# Altium PCB ArmBoard.PcbDoc
Units mil, origin at the board's own origin, x right, y up, seen from the top; angles counter-clockwise.
Board outline 6000 x 4000 mil, 2 copper layers (Top Layer, Bottom Layer); 61 components, 76 nets, 304 pads, 0 vias.
Unrouted connection lines stored in the file: 209.
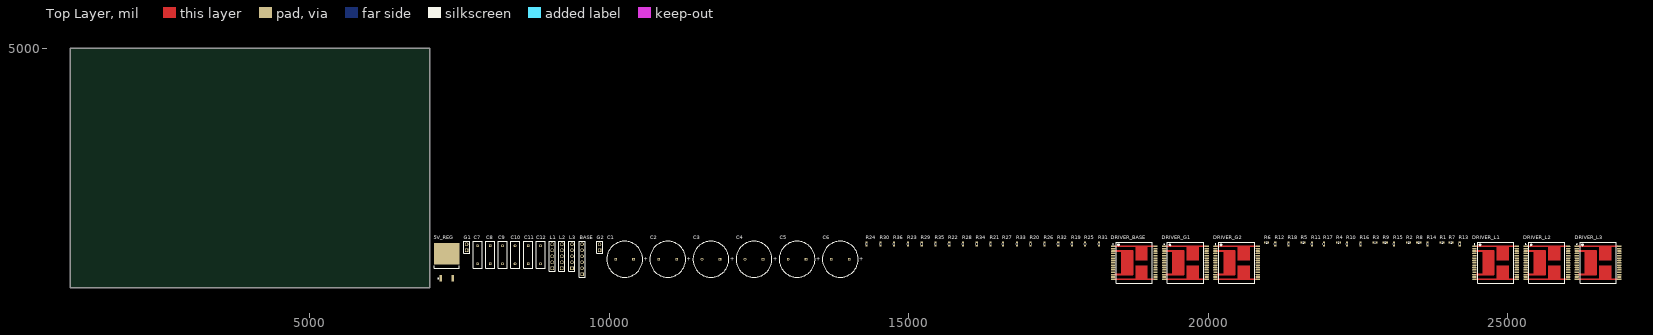
[diagram p0: Top Layer view]
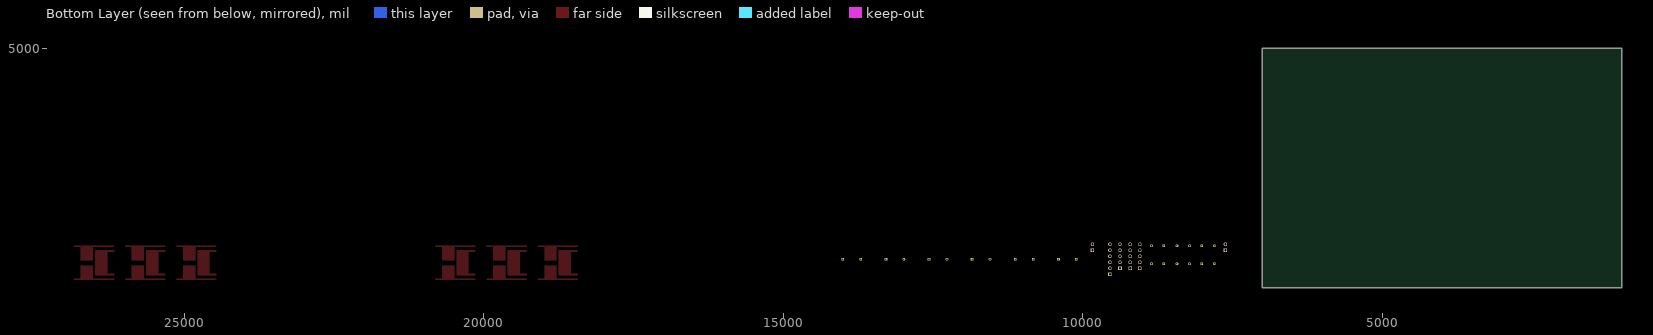
[diagram p1: Bottom Layer view, seen from below]

## Layer stack, top to bottom
Top Solder: solder mask 0.4, Solder Resist, Dk 3.5
Top Layer: signal copper 1.4
Dielectric 1: dielectric 12.6, FR-4, Dk 4.8
Bottom Layer: signal copper 1.4
Bottom Solder: solder mask 0.4, Solder Resist, Dk 3.5

## Board outline
1000,1000 7000,1000 7000,5000 1000,5000

## Design rules (kind name [scope] priority, off if disabled: settings)
Clearance [All] p1: gap=10
PolygonConnect [All] p1: connectstyle=Relief reliefconductorwidth=10 reliefentries=4 polygonreliefangle="90 Angle" airgapwidth=10
RoomDefinition ArmBoard [InComponentClass('ArmBoard')] p1: confinementstyle=ConfineIn formatcopy=TRUE lockcomponents=FALSE outline 7045,1060 26920,1060 26920,1890 7045,1890
RoutingVias [All] p1: holewidth=28 width=50 viastyle="Through Hole" minholewidth=28 minwidth=50 maxholewidth=28 maxwidth=50
SolderMaskExpansion [All] p1: expansion=4
Width [All] p1: maxlimit=10 minlimit=10 preferedwidth=10
30 further rules are at their usual default settings.

## Components (designator, comment, footprint, x,y, rotation, side; value= is the part's Value field where it differs from the comment)
5V_REG "" D2PAK_M 7285,1430 r90 top
BASE "Header 6" HDR1X6 9545,1230 r90 top
C1 "" RB7.6-15 10255,1480 r0 top
C2 "" RB7.6-15 10975,1480 r0 top
C3 "" RB7.6-15 11695,1480 r0 top
C4 "" RB7.6-15 12415,1480 r0 top
C5 "" RB7.6-15 13135,1480 r0 top
C6 "" RB7.6-15 13855,1480 r0 top
C7 "" RAD-0.3 7800,1555 r90 top
C8 "" RAD-0.3 8010,1555 r90 top
C9 "" RAD-0.3 8215,1555 r90 top
C10 "" RAD-0.3 8425,1555 r90 top
C11 "" RAD-0.3 8645,1555 r90 top
C12 "" RAD-0.3 8850,1555 r90 top
DRIVER_BASE "VNH5019 motor driver" VNH5019 18765,1420 r0 top
DRIVER_G1 "VNH5019 motor driver" VNH5019 19620,1420 r0 top
DRIVER_G2 "VNH5019 motor driver" VNH5019 20475,1420 r0 top
DRIVER_L1 "VNH5019 motor driver" VNH5019 24800,1420 r0 top
DRIVER_L2 "VNH5019 motor driver" VNH5019 25655,1420 r0 top
DRIVER_L3 "VNH5019 motor driver" VNH5019 26510,1420 r0 top
G1 "Header 2" HDR1X2 7615,1630 r90 top
G2 "Header 2" HDR1X2 9835,1630 r90 top
L1 "Header 5" HDR1X5 9045,1330 r90 top
L2 "Header 5" HDR1X5 9205,1330 r90 top
L3 "Header 5" HDR1X5 9375,1330 r90 top
R1 "Res3" J1-0603 23905,1760 r0 top
R2 "Res3" J1-0603 23345,1760 r0 top
R3 "Res3" J1-0603 22785,1760 r0 top
R4 "Res3" J1-0603 22175,1760 r0 top
R5 "Res3" J1-0603 21585,1760 r0 top
R6 "Res3" J1-0603 20975,1760 r0 top
R7 "Res3" J1-0603 24055,1760 r0 top
R8 "Res3" J1-0603 23515,1760 r0 top
R9 "Res3" J1-0603 22955,1760 r0 top
R10 "Res3" J1-0603 22320,1735 r90 top
R11 "Res3" J1-0603 21730,1735 r90 top
R12 "Res3" J1-0603 21120,1735 r90 top
R13 "Res3" J1-0603 24200,1735 r90 top
R14 "Res3" J1-0603 23660,1735 r90 top
R15 "Res3" J1-0603 23100,1735 r90 top
R16 "Res3" J1-0603 22540,1735 r90 top
R17 "Res3" J1-0603 21930,1735 r90 top
R18 "Res3" J1-0603 21340,1735 r90 top
R19 "Res3" J1-0603 17725,1735 r90 top
R20 "Res3" J1-0603 17035,1735 r90 top
R21 "Res3" J1-0603 16365,1735 r90 top
R22 "Res3" J1-0603 15675,1735 r90 top
R23 "Res3" J1-0603 14985,1735 r90 top
R24 "Res3" J1-0603 14295,1735 r90 top
R25 "Res3" J1-0603 17945,1735 r90 top
R26 "Res3" J1-0603 17265,1735 r90 top
R27 "Res3" J1-0603 16575,1735 r90 top
R28 "Res3" J1-0603 15905,1735 r90 top
R29 "Res3" J1-0603 15215,1735 r90 top
R30 "Res3" J1-0603 14525,1735 r90 top
R31 "Res3" J1-0603 18175,1735 r90 top
R32 "Res3" J1-0603 17495,1735 r90 top
R33 "Res3" J1-0603 16805,1735 r90 top
R34 "Res3" J1-0603 16135,1735 r90 top
R35 "Res3" J1-0603 15445,1735 r90 top
R36 "Res3" J1-0603 14755,1735 r90 top

## Footprints (in the part's own frame and the unit in brackets; to place one, negate y for a bottom-side part, rotate by r counter-clockwise, add the part's x,y. Pads: shape width x height; smd on the part's side, far side on the other; paste and mask are expansions set on the pad)
D2PAK_M [mm] "D2-PAK, 4-Leads, Body 8.8x10.4mm, Pitch 2.54mm, Lead Span 15.1mm, IPC Low Density"
  rect 2.7x1.1 smd: 1(-6.85,2.54) 3(-6.85,-2.54)
  rect 9.2x10.7 smd: 2(3.6,0)
  silkscreen extent -6.97,-5.25 -1.4,5.25, body extent -2.65,-5.28 6.35,5.28, height 4.69
HDR1X2 [mm] "Connector; Header; 2 Position"
  rect 1.5x1.5 hole 0.9: 1(0,0)
  round 1.5 hole 0.9: 2(2.54,0)
  silkscreen extent -1.27,-1.27 3.81,1.27
HDR1X5 [mm] "Connector; Header; 5 Position"
  rect 1.5x1.5 hole 0.9: 1(0,0)
  round 1.5 hole 0.9: 2(2.54,0) 3(5.08,0) 4(7.62,0) 5(10.16,0)
  silkscreen extent -1.27,-1.27 11.43,1.27
HDR1X6 [mm] "Connector; Header; 6 Position"
  rect 1.5x1.5 hole 0.9: 1(0,0)
  round 1.5 hole 0.9: 2(2.54,0) 3(5.08,0) 4(7.62,0) 5(10.16,0) 6(12.7,0)
  silkscreen extent -1.27,-1.27 13.97,1.27
J1-0603 [mm] "Chip Resistor, Body 1.6x0.8mm, IPC High Density"
  rect 0.7x0.9 smd: 1(-0.75,0) 2(0.75,0)
  silkscreen extent -0.2,-0.35 0.2,0.35, body extent -0.85,-0.48 0.85,0.48, height 0.9
RAD-0.3 [mm] "Radial Cap, Thru-Hole; 2 Leads; 0.3 in Pin Spacing"
  round 1.2 hole 0.7: 1(-3.81,0) 2(3.81,0)
  silkscreen extent -5.71,-1.91 5.71,1.91
RB7.6-15 [mm] "Polarized Capacitor (Radial); 2 Leads"
  rect 1.2x1.2 hole 0.7: 1(3.81,0)
  round 1.2 hole 0.7: 2(-3.81,0)
  silkscreen extent -7.62,-7.62 7.62,7.62
VNH5019 [mm] "MultiPowerSO-30"
  oval 1.9x0.7 smd: 1(-9,7) 2(-9,6) 3(-9,5) 4(-9,4) 5(-9,3) 6(-9,2) 7(-9,1) 8(-9,0) 9(-9,-1) 10(-9,-2) 11(-9,-3) 12(-9,-4) 13(-9,-5) 14(-9,-6) 15(-9,-7) 16(9,-7) 17(9,-6) 18(9,-5) 19(9,-4) 20(9,-3) 21(9,-2) 22(9,-1) 23(9,0) 24(9,1) 25(9,2) 26(9,3) 27(9,4) 28(9,5) 29(9,6) 30(9,7)
  Top Layer region: 0.425,-7.28 5.675,-7.28 5.675,-1.05 0.425,-1.05
  Top Layer region: -5.675,-5.15 -0.425,-5.15 -0.425,5.15 -5.675,5.15
  Top Layer region: 0.425,1.05 5.675,1.05 5.675,7.28 0.425,7.28
  Top Layer lines w0.75: -8.25,-7 8.2,-7 ; -8.25,-5 -0.8,-5 ; -8.25,5 -0.8,5 ; -8.25,7 8.25,7
  silkscreen extent -9.12,-8.65 7.65,8.65, body extent -8.05,-8.65 8.05,8.65, height 2.35

## Part data
5V_REG: library part "Volt Reg", "Voltage Regulator"
BASE: "Header, 6-Pin"
C1 C2 C3 C4 C5 C6: library part "Cap Pol1", "Polarized Capacitor (Radial)"
C7 C8 C9 C10 C11 C12: library part Cap, "Capacitor"
DRIVER_BASE DRIVER_G1 DRIVER_G2 DRIVER_L1 DRIVER_L2 DRIVER_L3: library part VNH5019, "Motor driver"
G1 G2: "Header, 2-Pin"
L1 L2 L3: "Header, 5-Pin"
R1 R2 R3 R4 R5 R6 R7 R8 R9 R10 R11 R12 R13 R14 R15 R16 R17 R18 R19 R20 R21 R22 R23 R24 R25 R26 R27 R28 R29 R30 R31 R32 R33 R34 R35 R36: "Resistor"

## Nets (pads, with @x,y where several pads share a name; then routed paths per layer and width w, separated by ;. In a path a pad name is that pad's centre, name@x,y a point inside that pad or via, vN(x,y) a via of type N, cw(c..) or ccw(c..) an arc to the next point about the centre after c; other vN are vias at no path point)
5V: 5V_REG.3 BASE.3 L1.3 L2.3 L3.3
BASE_DATA_IN: 
BASE_DATA_OUT: 
BASE_INTA: BASE.4
BASE_INTB: BASE.5
BASE_INTERRUPT: 
CP: DRIVER_BASE.11 DRIVER_G1.11 DRIVER_G2.11 DRIVER_L1.11 DRIVER_L2.11 DRIVER_L3.11
GND: 5V_REG.2 BASE.6 C1.2 C2.2 C3.2 C4.2 C5.2 C6.2 C7.2 C8.2 C9.2 C10.2 C11.2 C12.2 DRIVER_BASE.17 DRIVER_BASE.18 DRIVER_BASE.19 DRIVER_BASE.20 DRIVER_BASE.26 DRIVER_BASE.27 DRIVER_BASE.28 DRIVER_BASE.29 DRIVER_G1.17 DRIVER_G1.18 DRIVER_G1.19 DRIVER_G1.20 DRIVER_G1.26 DRIVER_G1.27 DRIVER_G1.28 DRIVER_G1.29 DRIVER_G2.17 DRIVER_G2.18 DRIVER_G2.19 DRIVER_G2.20 DRIVER_G2.26 DRIVER_G2.27 DRIVER_G2.28 DRIVER_G2.29 DRIVER_L1.17 DRIVER_L1.18 DRIVER_L1.19 DRIVER_L1.20 DRIVER_L1.26 DRIVER_L1.27 DRIVER_L1.28 DRIVER_L1.29 DRIVER_L2.17 DRIVER_L2.18 DRIVER_L2.19 DRIVER_L2.20 DRIVER_L2.26 DRIVER_L2.27 DRIVER_L2.28 DRIVER_L2.29 DRIVER_L3.17 DRIVER_L3.18 DRIVER_L3.19 DRIVER_L3.20 DRIVER_L3.26 DRIVER_L3.27 DRIVER_L3.28 DRIVER_L3.29 L1.5 L2.5 L3.5 R5.1 R6.1 R11.1 R12.1 R17.1 R18.1 R23.1 R24.1 R29.1 R30.1 R35.1 R36.1
INA_BASE: R20.1
INA_G1: R26.1
INA_G2: R32.1
INA_L1: R2.1
INA_L2: R8.1
INA_L3: R14.1
INB_BASE: R21.1
INB_G1: R27.1
INB_G2: R33.1
INB_L1: R3.1
INB_L2: R9.1
INB_L3: R15.1
NetDRIVER_BASE_4: DRIVER_BASE.4 R20.2
NetDRIVER_BASE_5: DRIVER_BASE.5 DRIVER_BASE.9 R19.1
NetDRIVER_BASE_7: DRIVER_BASE.7 R22.2
NetDRIVER_BASE_8: DRIVER_BASE.8 R24.2
NetDRIVER_BASE_10: DRIVER_BASE.10 R21.2
NetDRIVER_G1_4: DRIVER_G1.4 R26.2
NetDRIVER_G1_5: DRIVER_G1.5 DRIVER_G1.9 R25.1
NetDRIVER_G1_7: DRIVER_G1.7 R28.2
NetDRIVER_G1_8: DRIVER_G1.8 R30.2
NetDRIVER_G1_10: DRIVER_G1.10 R27.2
NetDRIVER_G2_4: DRIVER_G2.4 R32.2
NetDRIVER_G2_5: DRIVER_G2.5 DRIVER_G2.9 R31.1
NetDRIVER_G2_7: DRIVER_G2.7 R34.2
NetDRIVER_G2_8: DRIVER_G2.8 R36.2
NetDRIVER_G2_10: DRIVER_G2.10 R33.2
NetDRIVER_L1_4: DRIVER_L1.4 R2.2
NetDRIVER_L1_5: DRIVER_L1.5 DRIVER_L1.9 R1.1
NetDRIVER_L1_7: DRIVER_L1.7 R4.2
NetDRIVER_L1_8: DRIVER_L1.8 R6.2
NetDRIVER_L1_10: DRIVER_L1.10 R3.2
NetDRIVER_L2_4: DRIVER_L2.4 R8.2
NetDRIVER_L2_5: DRIVER_L2.5 DRIVER_L2.9 R7.1
NetDRIVER_L2_7: DRIVER_L2.7 R10.2
NetDRIVER_L2_8: DRIVER_L2.8 R12.2
NetDRIVER_L2_10: DRIVER_L2.10 R9.2
NetDRIVER_L3_4: DRIVER_L3.4 R14.2
NetDRIVER_L3_5: DRIVER_L3.5 DRIVER_L3.9 R13.1
NetDRIVER_L3_7: DRIVER_L3.7 R16.2
NetDRIVER_L3_8: DRIVER_L3.8 R18.2
NetDRIVER_L3_10: DRIVER_L3.10 R15.2
OUTA_BASE: BASE.1 DRIVER_BASE.1 DRIVER_BASE.24 DRIVER_BASE.25 DRIVER_BASE.30
OUTA_G1: DRIVER_G1.1 DRIVER_G1.24 DRIVER_G1.25 DRIVER_G1.30 G1.1
OUTA_G2: DRIVER_G2.1 DRIVER_G2.24 DRIVER_G2.25 DRIVER_G2.30 G2.1
OUTA_L1: DRIVER_L1.1 DRIVER_L1.24 DRIVER_L1.25 DRIVER_L1.30 L1.1
OUTA_L2: DRIVER_L2.1 DRIVER_L2.24 DRIVER_L2.25 DRIVER_L2.30 L2.1
OUTA_L3: DRIVER_L3.1 DRIVER_L3.24 DRIVER_L3.25 DRIVER_L3.30 L3.1
OUTB_BASE: BASE.2 DRIVER_BASE.15 DRIVER_BASE.16 DRIVER_BASE.21 DRIVER_BASE.22
OUTB_G1: DRIVER_G1.15 DRIVER_G1.16 DRIVER_G1.21 DRIVER_G1.22 G1.2
OUTB_G2: DRIVER_G2.15 DRIVER_G2.16 DRIVER_G2.21 DRIVER_G2.22 G2.2
OUTB_L1: DRIVER_L1.15 DRIVER_L1.16 DRIVER_L1.21 DRIVER_L1.22 L1.2
OUTB_L2: DRIVER_L2.15 DRIVER_L2.16 DRIVER_L2.21 DRIVER_L2.22 L2.2
OUTB_L3: DRIVER_L3.15 DRIVER_L3.16 DRIVER_L3.21 DRIVER_L3.22 L3.2
PWM_BASE: R22.1 R23.2
PWM_G1: R28.1 R29.2
PWM_G2: R34.1 R35.2
PWM_L1: R4.1 R5.2
PWM_L2: R10.1 R11.2
PWM_L3: R16.1 R17.2
SCL: 
SDA: 
V_BAT: DRIVER_BASE.12 DRIVER_G1.12 DRIVER_G2.12 DRIVER_L1.12 DRIVER_L2.12 DRIVER_L3.12
VCC: 5V_REG.1 C1.1 C2.1 C3.1 C4.1 C5.1 C6.1 C7.1 C8.1 C9.1 C10.1 C11.1 C12.1 DRIVER_BASE.2 DRIVER_BASE.3 DRIVER_BASE.13 DRIVER_BASE.14 DRIVER_BASE.23 DRIVER_G1.2 DRIVER_G1.3 DRIVER_G1.13 DRIVER_G1.14 DRIVER_G1.23 DRIVER_G2.2 DRIVER_G2.3 DRIVER_G2.13 DRIVER_G2.14 DRIVER_G2.23 DRIVER_L1.2 DRIVER_L1.3 DRIVER_L1.13 DRIVER_L1.14 DRIVER_L1.23 DRIVER_L2.2 DRIVER_L2.3 DRIVER_L2.13 DRIVER_L2.14 DRIVER_L2.23 DRIVER_L3.2 DRIVER_L3.3 DRIVER_L3.13 DRIVER_L3.14 DRIVER_L3.23
VDD: R1.2 R7.2 R13.2 R19.2 R25.2 R31.2
WIPER_L1: L1.4
WIPER_L2: L2.4
WIPER_L3: L3.4
pads on no net: DRIVER_BASE.6 DRIVER_G1.6 DRIVER_G2.6 DRIVER_L1.6 DRIVER_L2.6 DRIVER_L3.6

## Text inside footprints (layer, text, board x,y; h text height)
C1: Top Overlay "+" at 10575.15,1450.99 h59.06
C2: Top Overlay "+" at 11295.15,1450.99 h59.06
C3: Top Overlay "+" at 12015.15,1450.99 h59.06
C4: Top Overlay "+" at 12735.15,1450.99 h59.06
C5: Top Overlay "+" at 13455.15,1450.99 h59.06
C6: Top Overlay "+" at 14175.15,1450.99 h59.06